# EAGLE board matrix_main_panel (EAGLE 9.5.2)
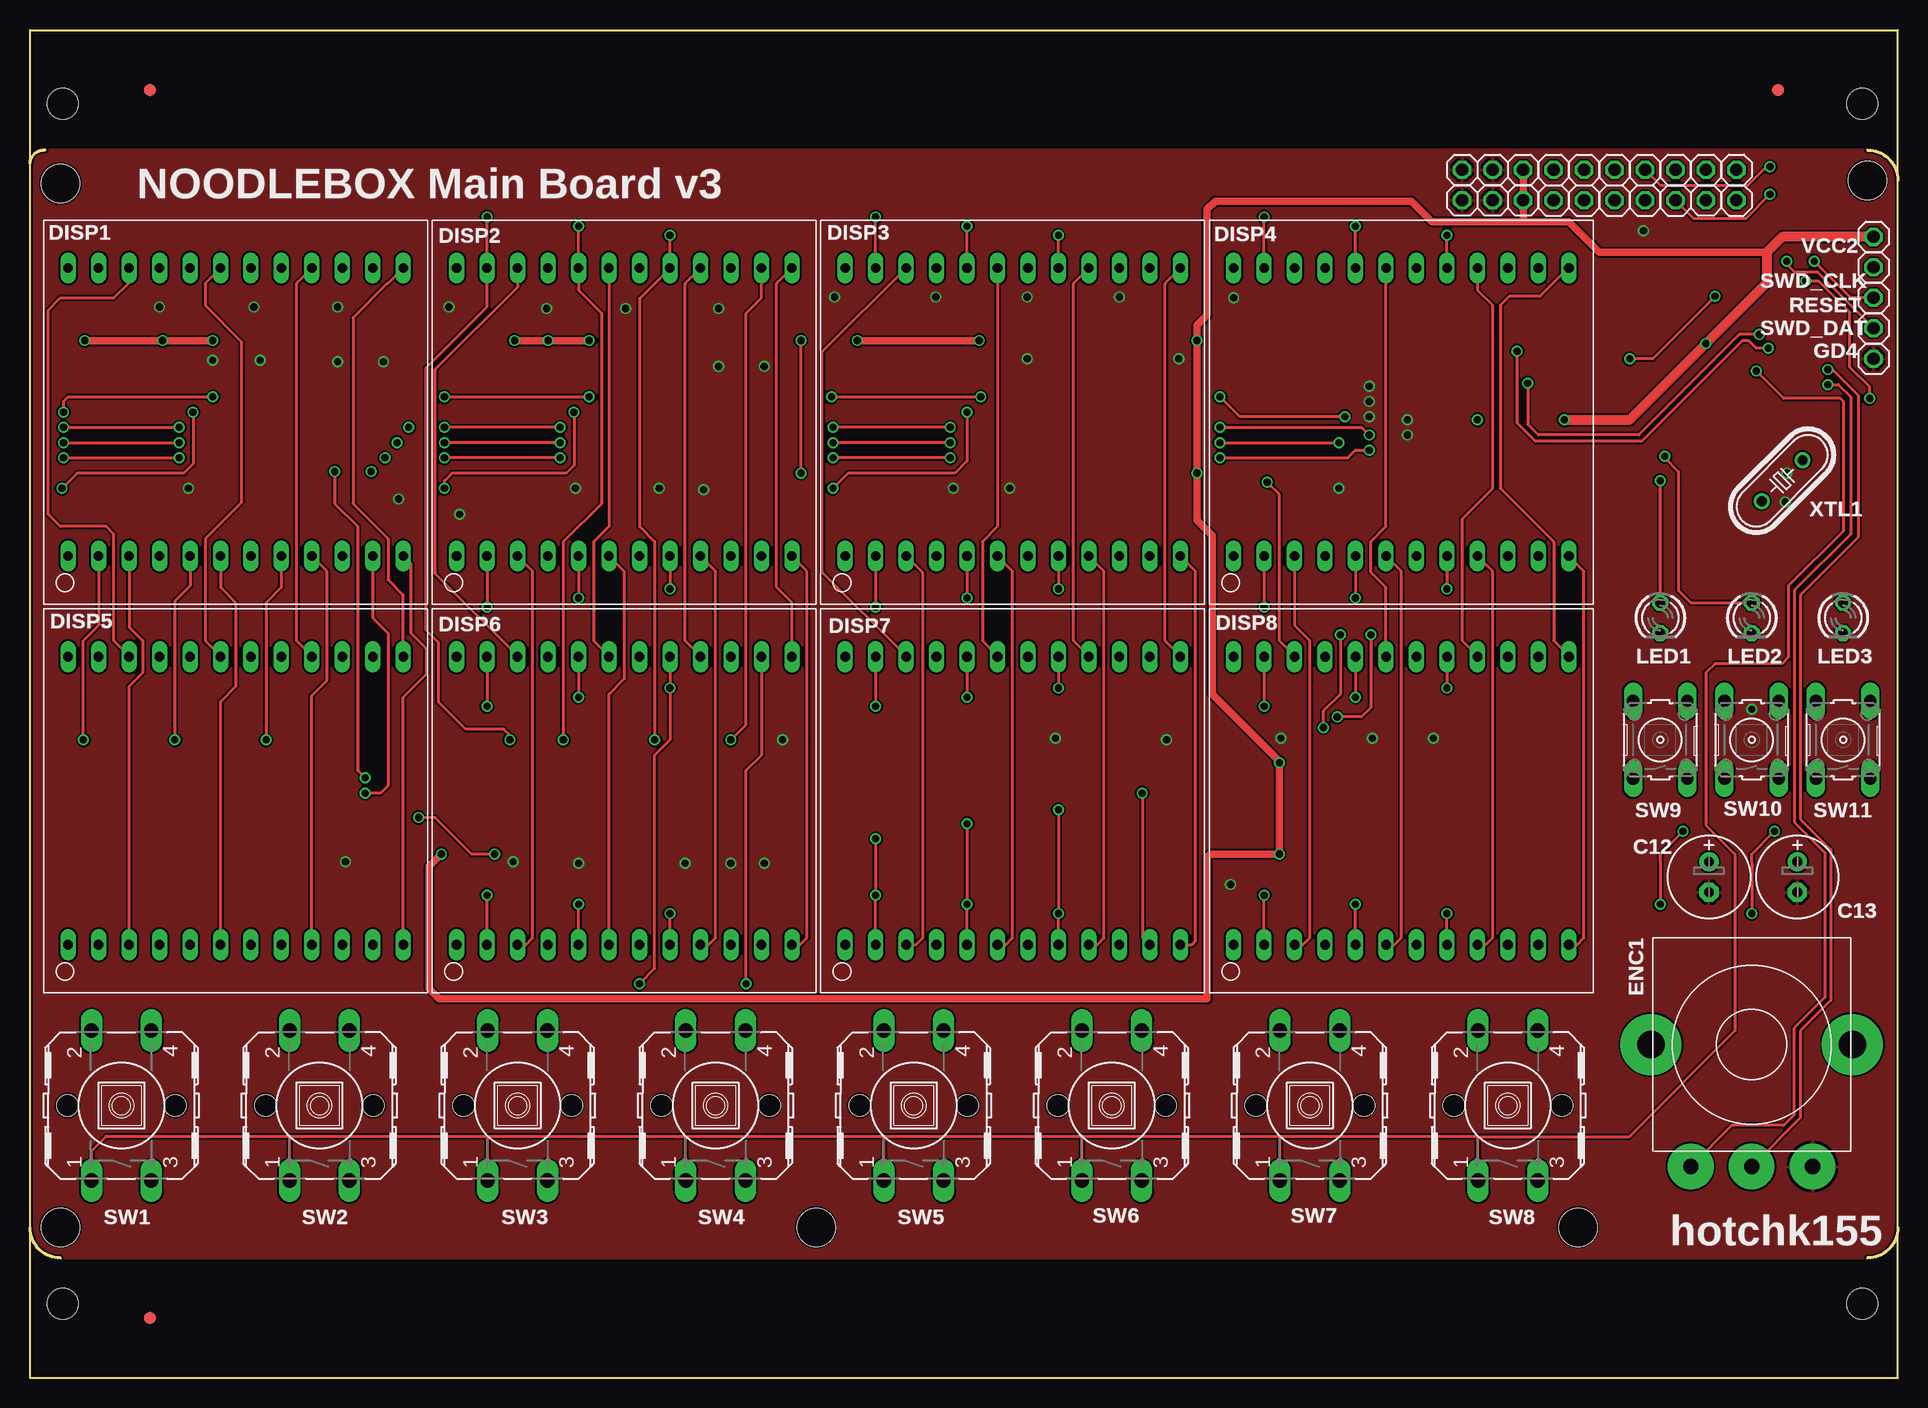
[diagram p0: board, top side]
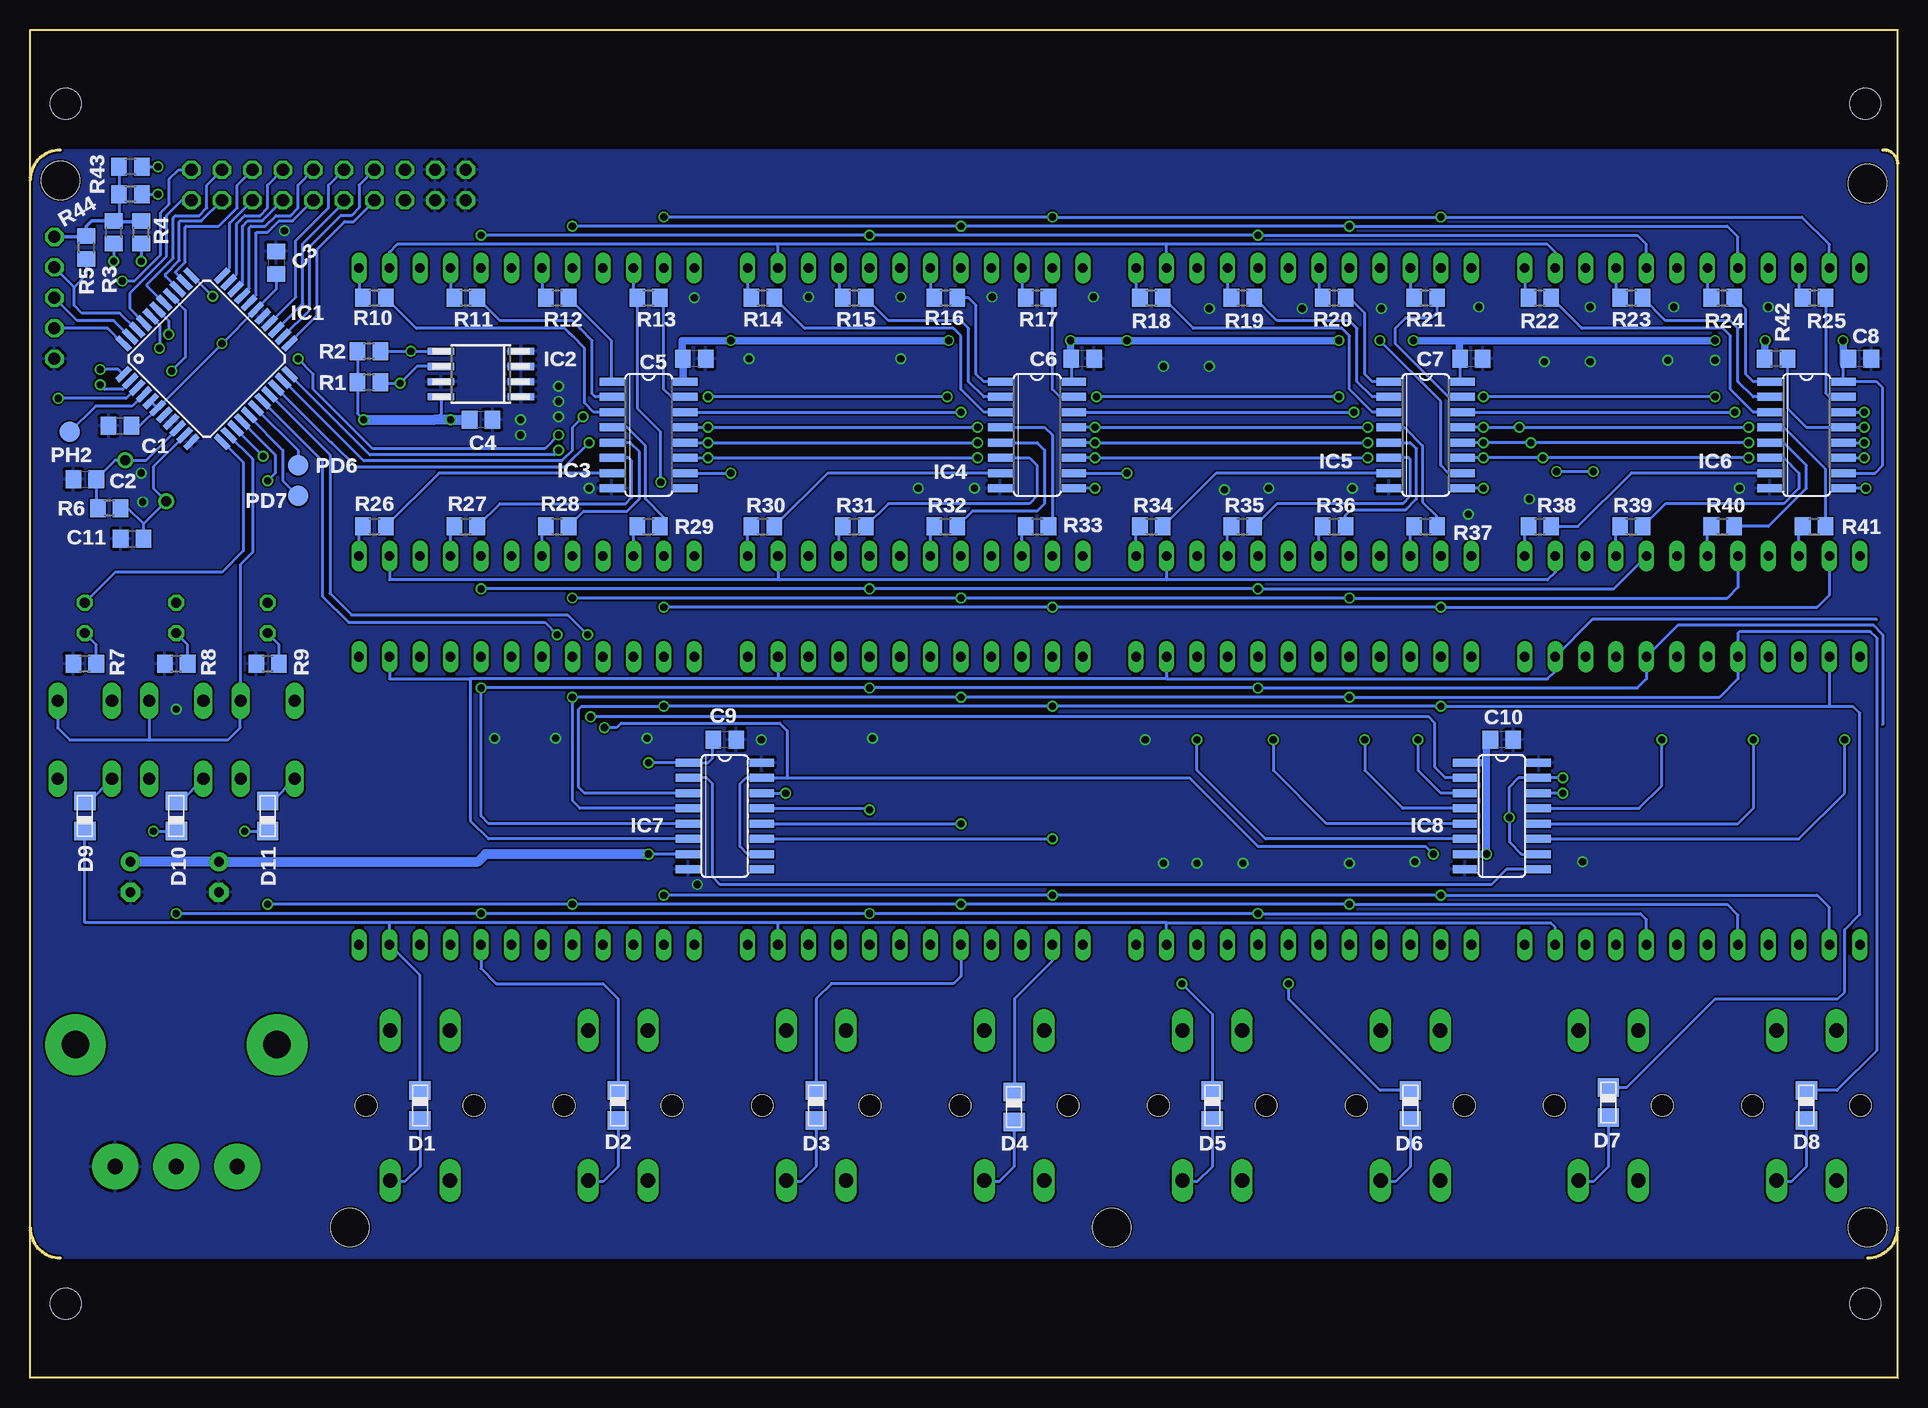
[diagram p1: board, bottom side, seen from below]

Size 155.7 x 112.33 mm. Coordinates in mm from the lower left corner, seen from the top.
Outline: 155.7,12.54 arc-90 153.16,10
Outline: 2.54,10 arc-90 0,12.54
Outline: 0,101.19 arc-93 1.27,102.33
Outline: 153.16,102.33 arc-90 155.7,99.79
Outline: 0,112.33 155.7,112.33 155.7,0 0,0 0,112.33
Copper layers (1*16): Top 0.035mm / dielectric 1.5mm / Bottom 0.035mm
Design rules "hackvana": minimum track width 6mil, minimum drill 0.3mm, track to track 6mil, track to pad 9mil, pad to pad 6mil, via to via 6mil, smd to smd 0mil, copper to edge 6mil, drill to drill 6mil, minimum pad ring 10mil, minimum via ring 6mil, stop-mask expansion 2mil, vias tented up to drill 100mil, thermal gap 10mil
Holes 3.2 mm at 2.54,12.54 2.54,99.53 153.16,99.79 65.53,12.54 129.03,12.54
Holes 2.54 mm at 2.73,106.19 152.73,106.19 152.73,6.19 2.73,6.19

## Footprints (pad centres in the part's own frame; a part is rotated, then mirrored left to right if it is on the bottom)
1X01 = drill 1.016 octagon: 1 0,0
C0805 = smd 1.3 x 1.5: 1 -0.95,0; 2 0.95,0
E2,5-7 = drill 0.813 pad 1.6: + -1.27,0 | drill 0.813 pad 1.6 octagon: - 1.27,0
0805DIODE = smd 1.524 x 1.778: A -1.262,-0.005; C 1.238,-0.005
1388_24PIN = drill 0.8 long: P$1 -13.97,-12; P$2 -11.43,-12; P$3 -8.89,-12; P$4 -6.35,-12; P$5 -3.81,-12; P$6 -1.27,-12; P$7 1.27,-12; P$8 3.81,-12; P$9 6.35,-12; P$10 8.89,-12; P$11 11.43,-12; P$12 13.97,-12; P$13 13.97,12; P$14 11.43,12; P$15 8.89,12; P$16 6.35,12; P$17 3.81,12; P$18 1.27,12; P$19 -1.27,12; P$20 -3.81,12; P$21 -6.35,12; P$22 -8.89,12; P$23 -11.43,12; P$24 -13.97,12
FIDUCIAL_1MM = smd 1 x 1: 1 0,0
ENCODER = drill 1.27 pad 3.81: A 5.08,10.16; B 0,10.16; C -5.08,10.16 | drill 2.286 pad 5.08: P$1 8.4,0; P$2 -8.4,0
TQFP44 = smd 1.5 x 0.5: 1 -5.8,4; 2 -5.8,3.2; 3 -5.8,2.4; 4 -5.8,1.6; 5 -5.8,0.8; 6 -5.8,0; 7 -5.8,-0.8; 8 -5.8,-1.6; 9 -5.8,-2.4; 10 -5.8,-3.2; 11 -5.8,-4; 23 5.8,-4; 24 5.8,-3.2; 25 5.8,-2.4; 26 5.8,-1.6; 27 5.8,-0.8; 28 5.8,0; 29 5.8,0.8; 30 5.8,1.6; 31 5.8,2.4; 32 5.8,3.2; 33 5.8,4 | smd 0.5 x 1.5: 12 -4,-5.8; 13 -3.2,-5.8; 14 -2.4,-5.8; 15 -1.6,-5.8; 16 -0.8,-5.8; 17 0,-5.8; 18 0.8,-5.8; 19 1.6,-5.8; 20 2.4,-5.8; 21 3.2,-5.8; 22 4,-5.8; 34 4,5.8; 35 3.2,5.8; 36 2.4,5.8; 37 1.6,5.8; 38 0.8,5.8; 39 0,5.8; 40 -0.8,5.8; 41 -1.6,5.8; 42 -2.4,5.8; 43 -3.2,5.8; 44 -4,5.8
SO-08M = smd 0.6 x 2.2: 1 -1.905,-3.33; 2 -0.635,-3.33; 3 0.635,-3.33; 4 1.905,-3.33; 5 1.905,3.33; 6 0.635,3.33; 7 -0.635,3.33; 8 -1.905,3.33
SO16 = smd 0.66 x 2.032: 1 -4.445,-3.073; 2 -3.175,-3.073; 3 -1.905,-3.073; 4 -0.635,-3.073; 5 0.635,-3.073; 6 1.905,-3.073; 7 3.175,-3.073; 8 4.445,-3.073; 9 4.445,3.073; 10 3.175,3.073; 11 1.905,3.073; 12 0.635,3.073; 13 -0.635,3.073; 14 -1.905,3.073; 15 -3.175,3.073; 16 -4.445,3.073
LED3MM = drill 0.813 octagon: A -1.27,0; K 1.27,0
TP17R = smd 1.7 x 1.7: TP 0,0
R0805 = smd 1.3 x 1.5: 1 -0.95,0; 2 0.95,0
B3F-40XX = drill 1.194 long: 1 -6.248,2.489; 2 6.248,2.489; 3 -6.248,-2.489; 4 6.248,-2.489 | hole 1.803: 0,-4.496; 0,4.496
B3F-10XX = drill 1.016 long: 1 -3.251,2.261; 2 3.251,2.261; 3 -3.251,-2.261; 4 3.251,-2.261
HC49/S = drill 0.813: 1 -2.413,0; 2 2.413,0

## Placement (x,y rotation side)
AUXIN  [1X01]  139.7,98.14 0 top
C1  [C0805]  148.21,79.34 0 bottom
C2  18p  [C0805]  151.13,74.9 0 bottom
C3  [C0805]  135.19,92.93 270 bottom
C4  [C0805]  118.11,79.85 180 bottom
C5  [C0805]  100.33,84.93 180 bottom
C6  [C0805]  67.95,84.93 180 bottom
C7  [C0805]  35.56,84.93 180 bottom
C8  [C0805]  3.18,84.93 180 bottom
C9  [C0805]  97.79,53.18 180 bottom
C10  [C0805]  33.02,53.18 180 bottom
C11  18p  [C0805]  147.19,69.94 0 bottom
C12  [E2,5-7]  139.95,41.75 270 top
C13  [E2,5-7]  147.32,41.75 270 top
CKOUT  [1X01]  142.24,98.14 90 top
CLKIN  [1X01]  137.16,100.68 90 top
D1  0805DIODE  [0805DIODE]  123.19,22.7 270 bottom
D2  0805DIODE  [0805DIODE]  106.68,22.7 270 bottom
D3  0805DIODE  [0805DIODE]  90.17,22.7 270 bottom
D4  0805DIODE  [0805DIODE]  73.66,22.57 270 bottom
D5  0805DIODE  [0805DIODE]  57.15,22.7 270 bottom
D6  0805DIODE  [0805DIODE]  40.64,22.7 270 bottom
D7  0805DIODE  [0805DIODE]  24.13,22.95 270 bottom
D8  0805DIODE  [0805DIODE]  7.62,22.7 270 bottom
D9  0805DIODE  [0805DIODE]  151.13,46.83 90 bottom
D10  0805DIODE  [0805DIODE]  143.51,46.83 90 bottom
D11  0805DIODE  [0805DIODE]  135.89,46.83 90 bottom
DISP1  1388BBMATRIX24PIN  [1388_24PIN]  17.14,80.48 0 top
DISP2  1388BBMATRIX24PIN  [1388_24PIN]  49.53,80.48 0 top
DISP3  1388BBMATRIX24PIN  [1388_24PIN]  81.92,80.48 0 top
DISP4  1388BBMATRIX24PIN  [1388_24PIN]  114.3,80.48 0 top
DISP5  1388BBMATRIX24PIN  [1388_24PIN]  17.14,48.1 0 top
DISP6  1388BBMATRIX24PIN  [1388_24PIN]  49.53,48.1 0 top
DISP7  1388BBMATRIX24PIN  [1388_24PIN]  81.92,48.1 0 top
DISP8  1388BBMATRIX24PIN  [1388_24PIN]  114.3,48.1 0 top
E$1  [FIDUCIAL_1MM]  10,107.33 0 top
E$2  [FIDUCIAL_1MM]  145.7,107.33 0 top
E$3  [FIDUCIAL_1MM]  10,5 0 top
ENC1  ENCODER  [ENCODER]  143.51,27.78 180 top
G1  [1X01]  129.54,100.68 90 top
G2  [1X01]  132.08,100.68 90 top
G3  [1X01]  134.62,98.14 90 top
G4  [1X01]  132.08,98.14 90 top
GD1  [1X01]  121.92,100.68 0 top
GD2  [1X01]  119.38,100.68 0 top
GD3  [1X01]  119.38,98.14 0 top
GD4  [1X01]  153.67,84.93 0 top
GD5  [1X01]  121.92,98.14 0 top
GX  [1X01]  129.54,98.14 90 top
IC1  MKE02_44PIN  [TQFP44]  140.97,84.93 45 bottom
IC2  24AA01SM  [SO-08M]  118.11,83.66 90 bottom
IC3  74HC595D  [SO16]  104.14,78.58 270 bottom
IC4  74HC595D  [SO16]  71.76,78.58 270 bottom
IC5  74HC595D  [SO16]  39.37,78.58 270 bottom
IC6  74HC595D  [SO16]  7.62,78.58 270 bottom
IC7  NPIC6C596  [SO16]  97.79,46.83 270 bottom
IC8  NPIC6C596  [SO16]  33.02,46.83 270 bottom
LED1  [LED3MM]  135.89,63.34 270 top
LED2  [LED3MM]  143.51,63.34 270 top
LED3  [LED3MM]  151.13,63.34 270 top
OFFSW  [1X01]  142.24,100.68 90 top
PD6  TPTP17R  [TP17R]  133.35,76.04 0 bottom
PD7  TPTP17R  [TP17R]  133.35,73.5 0 bottom
PH2  TPTP17R  [TP17R]  152.4,78.83 0 bottom
PWRCTL  [1X01]  139.7,100.68 90 top
R1  4k7  [R0805]  127.44,82.96 180 bottom
R2  4k7  [R0805]  127.44,85.56 180 bottom
R3  [R0805]  148.72,95.47 90 bottom
R4  [R0805]  146.43,95.47 90 bottom
R5  [R0805]  151,94.2 90 bottom
R6  [R0805]  149.1,72.48 180 bottom
R7  [R0805]  151.13,59.53 0 bottom
R8  [R0805]  143.51,59.53 0 bottom
R9  [R0805]  135.89,59.53 0 bottom
R10  [R0805]  127,90.01 0 bottom
R11  [R0805]  119.38,90.01 0 bottom
R12  [R0805]  111.76,90.01 0 bottom
R13  [R0805]  104.14,90.01 0 bottom
R14  [R0805]  94.62,90.01 0 bottom
R15  [R0805]  87,90.01 0 bottom
R16  [R0805]  79.38,90.01 0 bottom
R17  [R0805]  71.76,90.01 0 bottom
R18  [R0805]  62.23,90.01 0 bottom
R19  [R0805]  54.61,90.01 0 bottom
R20  [R0805]  46.99,90.01 0 bottom
R21  [R0805]  39.37,90.01 0 bottom
R22  [R0805]  29.84,90.01 0 bottom
R23  [R0805]  22.23,90.01 0 bottom
R24  [R0805]  14.61,90.01 0 bottom
R25  [R0805]  6.99,90.01 0 bottom
R26  [R0805]  127,70.96 0 bottom
R27  [R0805]  119.38,70.96 0 bottom
R28  [R0805]  111.76,70.96 0 bottom
R29  [R0805]  104.14,70.96 0 bottom
R30  [R0805]  94.62,70.96 0 bottom
R31  [R0805]  87,70.96 0 bottom
R32  [R0805]  79.38,70.96 0 bottom
R33  [R0805]  71.76,70.96 0 bottom
R34  [R0805]  62.23,70.96 0 bottom
R35  [R0805]  54.61,70.96 0 bottom
R36  [R0805]  46.99,70.96 0 bottom
R37  [R0805]  39.37,70.96 0 bottom
R38  [R0805]  29.84,70.96 0 bottom
R39  [R0805]  22.23,70.96 0 bottom
R40  [R0805]  14.61,70.96 0 bottom
R41  [R0805]  6.99,70.96 0 bottom
R42  [R0805]  10.16,84.93 180 bottom
R43  4k7  [R0805]  147.32,100.93 180 bottom
R44  4k7  [R0805]  147.32,98.65 180 bottom
RESET  [1X01]  153.67,90.01 0 top
RX  [1X01]  127,100.68 90 top
SCL  [1X01]  134.62,100.68 90 top
SDA  [1X01]  137.16,98.14 90 top
SW1  [B3F-40XX]  7.62,22.7 90 top
SW2  [B3F-40XX]  24.13,22.7 90 top
SW3  [B3F-40XX]  40.64,22.7 90 top
SW4  [B3F-40XX]  57.15,22.7 90 top
SW5  [B3F-40XX]  73.66,22.7 90 top
SW6  [B3F-40XX]  90.17,22.7 90 top
SW7  [B3F-40XX]  106.68,22.7 90 top
SW8  [B3F-40XX]  123.19,22.7 90 top
SW9  [B3F-10XX]  135.89,53.18 90 top
SW10  [B3F-10XX]  143.51,53.18 90 top
SW11  [B3F-10XX]  151.13,53.18 90 top
SWD_CLK  [1X01]  153.67,92.55 0 top
SWD_DAT  [1X01]  153.67,87.47 0 top
TX  [1X01]  127,98.14 90 top
VCC  [1X01]  124.46,100.68 0 top
VCC1  [1X01]  124.46,98.14 0 top
VCC2  [1X01]  153.67,95.09 0 top
XTL1  20m  [HC49/S]  146.05,74.77 45 top

## Library data of the parts
AUXIN CKOUT CLKIN G1-G4 GD1-GD5 GX OFFSW PWRCTL RESET RX SCL SDA SWD_CLK SWD_DAT TX VCC VCC1 VCC2 = pinhead
C1-C13 R1-R44 = rcl
D1-D11 IC7 IC8 = jasons_stuff
DISP1-DISP8 ENC1 IC1 = jason_eagle6
E$1-E$3 = adafruit
IC2 = microchip; MF: MICROCHIP; MPN: 24AA01-I/SN; OC_FARNELL: 1331268; OC_NEWARK: 92C6793
IC3-IC6 = 74xx-eu
LED1-LED3 = led
PD6 PD7 PH2 = testpad
SW1-SW8 = switch-omron; MF: OMRON COMPONENTS USA; MPN: B3F-4000; OC_FARNELL: 176434; OC_NEWARK: 36K3105
SW9-SW11 = switch-omron; MPN: B3F-1000; OC_FARNELL: 176432; OC_NEWARK: 36M3542
XTL1 = crystal; OC_FARNELL: 1667008; OC_NEWARK: unknown

## Nets
+5V: C1.2 C3.2 C4.2 C5.2 C6.2 C7.2 C8.2 C9.2 C10.2 C12.+ C13.+ IC1.5 IC1.6 IC1.28 IC2.8 IC3.10 IC3.16 IC4.10 IC4.16 IC5.10 IC5.16 IC6.10 IC6.16 IC7.1 IC7.7 IC8.1 IC8.7 R1.2 R2.2 R3.2 R4.2 R5.2 R42.2 R43.2 R44.2 VCC1.1 VCC2.1 VCC.1
A0: DISP1.P$22 DISP5.P$22 R25.1
A1: DISP1.P$19 DISP5.P$19 R24.1
A2: DISP1.P$16 DISP5.P$16 R23.1
A3: DISP1.P$13 DISP5.P$13 R22.1
A4: DISP1.P$3 DISP5.P$3 R41.1
A5: DISP1.P$6 DISP5.P$6 R40.1
A6: DISP1.P$9 DISP5.P$9 R39.1
A7: DISP1.P$12 DISP5.P$12 R38.1
A8: DISP2.P$22 DISP6.P$22 R21.1
A9: DISP2.P$19 DISP6.P$19 R20.1
A10: DISP2.P$16 DISP6.P$16 R19.1
A11: DISP2.P$13 DISP6.P$13 R18.1
A12: DISP2.P$3 DISP6.P$3 R37.1
A13: DISP2.P$6 DISP6.P$6 R36.1
A14: DISP2.P$9 DISP6.P$9 R35.1
A15: DISP2.P$12 DISP6.P$12 R34.1
A16: DISP3.P$22 DISP7.P$22 R17.1
A17: DISP3.P$19 DISP7.P$19 R16.1
A18: DISP3.P$16 DISP7.P$16 R15.1
A19: DISP3.P$13 DISP7.P$13 R14.1
A20: DISP3.P$3 DISP7.P$3 R33.1
A21: DISP3.P$6 DISP7.P$6 R32.1
A22: DISP3.P$9 DISP7.P$9 R31.1
A23: DISP3.P$12 DISP7.P$12 R30.1
A24: DISP4.P$22 DISP8.P$22 R13.1
A25: DISP4.P$19 DISP8.P$19 R12.1
A26: DISP4.P$16 DISP8.P$16 R11.1
A27: DISP4.P$13 DISP8.P$13 R10.1
A28: DISP4.P$3 DISP8.P$3 R29.1
A29: DISP4.P$6 DISP8.P$6 R28.1
A30: DISP4.P$9 DISP8.P$9 R27.1
A31: DISP4.P$12 DISP8.P$12 R26.1
AUXIN: AUXIN.1 IC1.36
AUXOUT: GX.1 IC1.25
D_ACK: IC1.22 IC3.11 IC4.11 IC5.11 IC6.11
D_ADT: IC1.21 IC6.14
D_ARK: IC1.20 IC3.12 IC4.12 IC5.12 IC6.12
D_ENA: IC1.34 IC3.13 IC4.13 IC5.13 IC6.13 R42.1
D_KCK: IC1.19 IC7.10 IC7.15 IC8.10 IC8.15
D_KDT: IC1.18 IC8.2
ENC1: ENC1.B IC1.1
ENC2: ENC1.A IC1.2
GATE1: G3.1 IC1.31
GATE2: G2.1 IC1.30
GATE3: G4.1 IC1.29
GATE4: G1.1 IC1.26
GND: C1.1 C2.1 C3.1 C4.1 C5.1 C6.1 C7.1 C8.1 C9.1 C10.1 C11.1 C12.- C13.- ENC1.C GD1.1 GD2.1 GD3.1 GD4.1 GD5.1 IC1.8 IC1.11 IC1.27 IC2.1 IC2.2 IC2.3 IC2.4 IC2.7 IC3.8 IC4.8 IC5.8 IC6.8 IC7.8 IC7.16 IC8.8 IC8.16 R7.1 R8.1 R9.1
I2C0SCL: IC1.32 R43.1 SCL.1
I2C0SDA: IC1.33 R44.1 SDA.1
I2C1SCL: IC1.39 IC2.6 R1.1
I2C1SDA: IC1.40 IC2.5 R2.1
K0: DISP1.P$23 DISP2.P$23 DISP3.P$23 DISP4.P$23 IC8.3
K1: DISP1.P$20 DISP2.P$20 DISP3.P$20 DISP4.P$20 IC8.4
K2: DISP1.P$17 DISP2.P$17 DISP3.P$17 DISP4.P$17 IC8.5
K3: DISP1.P$14 DISP2.P$14 DISP3.P$14 DISP4.P$14 IC8.6
K4: DISP1.P$2 DISP2.P$2 DISP3.P$2 DISP4.P$2 IC8.11
K5: DISP1.P$5 DISP2.P$5 DISP3.P$5 DISP4.P$5 IC8.12
K6: DISP1.P$8 DISP2.P$8 DISP3.P$8 DISP4.P$8 IC8.13
K7: DISP1.P$11 DISP2.P$11 DISP3.P$11 DISP4.P$11 IC8.14
K8: D7.A DISP5.P$23 DISP6.P$23 DISP7.P$23 DISP8.P$23 IC7.3
K9: D8.A DISP5.P$20 DISP6.P$20 DISP7.P$20 DISP8.P$20 IC7.4
K10: D6.A DISP5.P$17 DISP6.P$17 DISP7.P$17 DISP8.P$17 IC7.5
K11: D5.A DISP5.P$14 DISP6.P$14 DISP7.P$14 DISP8.P$14 IC7.6
K12: D4.A DISP5.P$2 DISP6.P$2 DISP7.P$2 DISP8.P$2 IC7.11
K13: D3.A D11.A DISP5.P$5 DISP6.P$5 DISP7.P$5 DISP8.P$5 IC7.12
K14: D2.A D10.A DISP5.P$8 DISP6.P$8 DISP7.P$8 DISP8.P$8 IC7.13
K15: D1.A D9.A DISP5.P$11 DISP6.P$11 DISP7.P$11 DISP8.P$11 IC7.14
KEY_READ1: IC1.37 SW1.1 SW2.1 SW3.1 SW4.1 SW5.1 SW6.1 SW7.1 SW8.1
KEY_READ2: IC1.13 SW9.4 SW10.4 SW11.4
LED1: IC1.12 LED3.A
LED2: IC1.14 LED2.A
LED3: IC1.15 LED1.A
MIDIRX: IC1.24 RX.1
MIDITX: IC1.23 TX.1
N$1: D10.C SW10.1
N$2: LED3.K R7.2
N$3: LED2.K R8.2
N$4: C2.2 IC1.9 R6.2 XTL1.2
N$5: C11.2 IC1.10 R6.1 XTL1.1
N$6: LED1.K R9.2
N$7: D9.C SW11.1
N$8: D11.C SW9.1
N$9: D7.C SW2.3
N$11: D8.C SW1.3
N$13: D6.C SW3.3
N$14: D5.C SW4.3
N$16: D4.C SW5.3
N$17: IC6.15 R25.2
N$18: IC6.1 R24.2
N$19: IC6.2 R23.2
N$20: IC6.3 R22.2
N$21: IC6.4 R41.2
N$22: IC6.5 R40.2
N$23: IC6.6 R39.2
N$24: IC6.7 R38.2
N$30: IC5.14 IC6.9
N$31: IC4.14 IC5.9
N$32: IC3.14 IC4.9
N$49: IC5.15 R21.2
N$50: IC5.1 R20.2
N$51: IC5.2 R19.2
N$52: IC5.3 R18.2
N$53: IC5.4 R37.2
N$54: IC5.5 R36.2
N$55: IC5.6 R35.2
N$56: IC5.7 R34.2
N$60: D3.C SW6.3
N$61: D2.C SW7.3
N$62: D1.C SW8.3
N$81: IC4.15 R17.2
N$82: IC4.1 R16.2
N$83: IC4.2 R15.2
N$84: IC4.3 R14.2
N$85: IC4.4 R33.2
N$86: IC4.5 R32.2
N$87: IC4.6 R31.2
N$88: IC4.7 R30.2
N$113: IC3.15 R13.2
N$114: IC3.1 R12.2
N$115: IC3.2 R11.2
N$116: IC3.3 R10.2
N$117: IC3.4 R29.2
N$118: IC3.5 R28.2
N$119: IC3.6 R27.2
N$120: IC3.7 R26.2
N$122: IC7.2 IC8.9
NRESET: IC1.43 R3.1 RESET.1
OFF_SW: IC1.3 OFFSW.1
PTD6: IC1.17 PD6.TP
PTD7: IC1.16 PD7.TP
PTH2: IC1.4 PH2.TP
PWR_CTRL: IC1.38 PWRCTL.1
SWDCLK: IC1.42 R5.1 SWD_CLK.1
SWDIO: IC1.44 R4.1 SWD_DAT.1
SYNCIN: CLKIN.1 IC1.35
SYNCOUT: CKOUT.1 IC1.41

## Tracks (layer width: path | path; a pad name or v marks a point on that pad's centre or on a via)
+5V  (via drill 0.6, 0.6 pad 0.25)
  Top 0.254: v64.26,75.41 v64.26,86.45 | v43.18,86.45 40.89,86.45
  Top 0.61: v4.57,86.45 v11.05,86.45 v15.24,86.45 | v40.39,86.45 v43.18,86.45 v46.61,86.45 | v68.96,86.45 v79.12,86.45 | v34.29,43.66 33.27,42.64 33.27,32.42 34.1,31.59 98.11,31.59 98.11,43.4 98.36,43.66 v104.14,43.66 v104.14,51.27 104.14,51.4 98.55,56.99 98.55,70.2 97.28,71.47 v97.28,75.41 v97.28,86.45 97.28,87.72 98.11,88.55 98.11,97.38 98.81,98.08 115.12,98.08 116.84,96.36 124.46,96.36 | 124.46,96.36 128.27,96.36 130.81,93.82 144.78,93.82 | VCC.1 VCC1.1 124.46,96.36
  Top 0.813: v127.89,79.85 133.35,79.85 v139.7,86.2 144.78,91.28 144.78,93.82 146.05,95.09 VCC2.1
  Bottom 0.254: C6.2 68.9,83.24 IC4.16 | C7.2 36.51,83.24 IC5.16 | 4.55,84.51 IC6.16 1.78,83.02 1.27,82.52 1.27,76.04 1.9,75.41 IC6.10 | IC7.7 v104.14,43.66 | v104.14,51.27 IC7.1 99.19,51.27 98.81,51.66 98.81,53.11 C9.2 | IC4.10 v64.26,75.41 | C8.2 4.55,84.93 | IC3.10 v97.28,75.41 | IC5.10 37.46,75.41 38.1,76.04 38.1,81.37 v43.18,86.45 | IC1.6 146.56,79.34 C1.2 | IC1.5 | IC1.5 IC1.6 | IC2.8 121.44,80.33 121.92,79.85 | IC1.6 v139.7,86.2 IC1.28 135.19,90.71 C3.2 | R2.2 R1.2 128.39,80.36 v127.89,79.85 | 146.05,96.36 146.37,96.36 R4.2 | R43.2 R44.2 148.27,96.87 R3.2
  Bottom 0.305: 146.69,96.36 148.66,96.36 | R3.2 150.56,96.42 151,95.98 R5.2 | VCC2.1 151.06,95.09
  Bottom 0.61: 4.55,84.51 4.55,84.93 4.55,86.43 v4.57,86.45 | v15.24,86.45 36.7,86.45 | 36.7,86.45 v40.39,86.45 | C7.2 36.58,85 36.58,86.33 36.7,86.45 | v46.61,86.45 v64.26,86.45 v68.96,86.45 68.96,85 C6.2 | v79.12,86.45 v97.28,86.45 101.35,86.45 101.35,85 C5.2 101.28,83.24 IC3.16 | R42.2 11.11,86.39 v11.05,86.45 | IC8.7 v34.29,43.66 34.29,51.27 | 34.29,51.27 34.29,52.86 C10.2 | IC8.1 34.29,51.27
  Bottom 0.813: R4.2 146.62,96.61 146.62,96.43 146.69,96.36 | 148.66,96.36 R3.2 | 151.06,95.09 R5.2 | v104.14,43.66 117.73,43.66 118.36,43.02 C12.+ C13.+ | v127.89,79.85 121.92,79.85 v120.65,79.85 C4.2
A0
  Top 0.254: DISP5.P$22 8.26,60.16 6.99,61.43 6.99,70.33 6.35,70.96 2.54,70.96 1.52,71.98 1.52,88.99 2.54,90.01 6.99,90.01 8.26,91.28 DISP1.P$22
  Bottom 0.254: DISP1.P$22 8.26,90.33 R25.1
A1
  Top 0.254: DISP5.P$19 15.88,60.16 14.61,61.43 14.61,69.94 17.65,72.99 17.65,86.33 14.61,89.38 14.61,91.22 DISP1.P$19
  Bottom 0.254: DISP1.P$19 15.88,90.33 R24.1
A2
  Top 0.254: DISP5.P$16 23.5,60.16 22.23,61.43 22.23,91.22 DISP1.P$16
  Bottom 0.254: DISP1.P$16 23.5,90.33 R23.1
A3
  Top 0.254: 31.11,60.16 DISP5.P$13 31.11,65.25 29.84,66.52 29.84,69.94 26.92,72.86 26.92,88.36 29.78,91.22 29.84,91.22 DISP1.P$13
  Bottom 0.254: DISP1.P$13 31.11,90.33 R22.1
A4
  Top 0.254: DISP5.P$3 8.26,57.62 9.4,58.77 9.4,61.43 8.26,62.58 DISP1.P$3
  Bottom 0.254: DISP1.P$3 8.26,70.64 R41.1
A5
  Top 0.254: DISP5.P$6 15.88,56.35 17.14,57.62 17.14,64.61 15.88,65.88 DISP1.P$6
  Bottom 0.254: DISP1.P$6 15.88,70.64 R40.1
A6
  Top 0.254: DISP5.P$9 23.5,56.86 24.77,58.13 24.77,67.22 DISP1.P$9
  Bottom 0.254: DISP1.P$9 23.5,70.64 R39.1
A7
  Top 0.254: DISP1.P$12 31.75,67.85 31.75,62.07 33.02,60.8 33.02,58.64 31.11,56.74 DISP5.P$12
  Bottom 0.254: DISP1.P$12 31.11,70.64 R38.1
A8
  Top 0.254: DISP6.P$22 40.64,60.16 33.78,67.02 33.78,84.04 40.64,90.9 DISP2.P$22
  Bottom 0.254: DISP2.P$22 40.64,90.33 R21.1
A9
  Top 0.254: DISP6.P$19 48.26,60.16 46.99,61.43 46.99,69.69 48.26,70.96 DISP2.P$19
  Bottom 0.254: DISP2.P$19 48.26,90.33 R20.1
A10
  Top 0.254: DISP6.P$16 55.88,60.16 54.61,61.43 54.61,91.22 DISP2.P$16
  Bottom 0.254: DISP2.P$16 55.88,90.33 R19.1
A11
  Top 0.254: DISP2.P$13 62.23,91.22 62.23,65.88 63.5,64.61 DISP6.P$13
  Bottom 0.254: DISP2.P$13 63.5,90.33 R18.1
A12
  Top 0.254: DISP6.P$3 41.34,36.1 41.91,36.67 41.91,67.22 DISP2.P$3
  Bottom 0.254: DISP2.P$3 40.64,70.64 R37.1
A13
  Top 0.254: DISP2.P$6 49.53,67.22 49.53,58.26 48.26,56.99 DISP6.P$6
  Bottom 0.254: DISP2.P$6 48.26,70.64 R36.1
A14
  Top 0.254: DISP6.P$9 56.58,36.1 57.15,36.67 57.15,67.22 DISP2.P$9
  Bottom 0.254: DISP2.P$9 55.88,70.64 R35.1
A15
  Top 0.254: DISP6.P$12 64.2,36.1 64.77,36.67 64.77,67.22 DISP2.P$12
  Bottom 0.254: DISP2.P$12 63.5,70.64 R34.1
A16
  Top 0.254: DISP7.P$22 73.03,60.16 66.04,67.15 66.04,85.5 DISP3.P$22
  Bottom 0.254: DISP3.P$22 73.03,90.33 R17.1
A17
  Top 0.254: DISP7.P$19 80.65,60.16 79.38,61.43 79.38,69.69 80.65,70.96 DISP3.P$19
  Bottom 0.254: DISP3.P$19 80.65,90.33 R16.1
A18
  Top 0.254: DISP7.P$16 88.27,60.16 87,61.43 87,91.22 DISP3.P$16
  Bottom 0.254: DISP3.P$16 88.27,90.33 R15.1
A19
  Top 0.254: DISP7.P$13 95.89,60.16 94.62,61.43 94.62,91.22 DISP3.P$13
  Bottom 0.254: DISP3.P$13 95.89,90.33 R14.1
A20
  Top 0.254: DISP7.P$3 73.85,36.1 74.42,36.67 74.42,67.09 DISP3.P$3
  Bottom 0.254: DISP3.P$3 73.03,70.33 72.39,70.96 R33.1
A21
  Top 0.254: DISP7.P$6 81.34,36.1 81.92,36.67 81.92,67.22 DISP3.P$6
  Bottom 0.254: DISP3.P$6 80.65,70.64 R32.1
A22
  Top 0.254: DISP7.P$9 88.97,36.1 89.54,36.67 89.54,67.22 DISP3.P$9
  Bottom 0.254: DISP3.P$9 88.27,70.64 R31.1
A23
  Top 0.254: DISP7.P$12 96.84,36.1 97.16,36.42 97.16,67.22 DISP3.P$12
  Bottom 0.254: DISP3.P$12 95.89,70.64 R30.1
A24  (via drill 0.6 pad 0.25)
  Top 0.254: DISP8.P$22 105.41,60.16 104.14,61.43 104.14,73.63 v103.12,74.64
  Bottom 0.254: DISP4.P$22 105.41,90.01 R13.1 105.09,80.8 103.12,78.83 v103.12,74.64
A25
  Top 0.254: DISP4.P$19 113.03,70.96 111.76,69.69 111.76,67.15 113.03,65.88 DISP8.P$19
  Bottom 0.254: DISP4.P$19 113.03,90.33 R12.1
A26
  Top 0.254: DISP8.P$16 120.65,60.16 119.38,61.43 119.38,71.59 121.92,74.13 121.92,89.38 120.65,90.64 DISP4.P$16
  Bottom 0.254: DISP4.P$16 120.65,90.33 R11.1
A27
  Top 0.254: DISP8.P$13 128.27,60.16 127,61.43 127,69.69 122.56,74.13 122.56,89.38 123.32,90.14 125.86,90.14 128.2,92.48 DISP4.P$13
  Bottom 0.254: DISP4.P$13 128.27,90.33 R10.1
A28
  Top 0.254: DISP8.P$3 106.11,36.1 106.68,36.67 106.68,61.43 105.41,62.7 DISP4.P$3
  Bottom 0.254: DISP4.P$3 105.41,70.64 R29.1
A29
  Top 0.254: DISP8.P$6 113.73,36.1 114.3,36.67 114.3,67.22 DISP4.P$6
  Bottom 0.254: DISP4.P$6 113.03,70.64 R28.1
A30
  Top 0.254: DISP8.P$9 121.35,36.1 121.92,36.67 121.92,67.22 DISP4.P$9
  Bottom 0.254: DISP4.P$9 120.65,70.64 R27.1
A31
  Top 0.254: DISP8.P$12 128.97,36.1 129.54,36.67 129.54,67.22 DISP4.P$12 128.27,68.42
  Bottom 0.254: DISP4.P$12 128.27,70.64 R26.1
AUXIN
  Bottom 0.254: IC1.36 143.37,90.76 144.4,91.79 144.4,91.98 143.26,93.12 143.26,96.36 143.19,96.42 141.41,96.42 AUXIN.1
AUXOUT
  Bottom 0.254: IC1.25 135.14,87.33 132.97,89.5 132.97,94.52 129.54,97.95 GX.1
D_ACK  (via drill 0.6, 0.6 pad 0.25)
  Top 0.254: v2.79,76.67 v12.45,76.67 | v44.2,76.67 v34.54,76.67 | v76.71,76.67 v66.93,76.67 | v99.19,76.67 109.86,76.67 110.49,77.31 v111.63,77.31
  Bottom 0.254: IC6.11 v2.79,76.67 | v12.45,76.67 v29.59,76.67 v34.54,76.67 IC5.11 | v44.2,76.67 v66.93,76.67 IC4.11 | v76.71,76.67 v99.19,76.67 IC3.11 | IC1.22 134.04,83.59 127.38,76.93 112.01,76.93 v111.63,77.31
D_ADT  (via drill 0.6, 0.6 pad 0.25)
  Top 0.254: v2.79,80.48 2.79,81.37 3.18,81.75 v15.24,81.75 | v34.54,81.75 v46.61,81.75 | v66.8,81.75 v79.25,81.75 | v109.6,80.1 100.84,80.1 v99.19,81.75
  Bottom 0.254: IC6.14 v2.79,80.48 | v15.24,81.75 v34.54,81.75 | v46.61,81.75 v66.8,81.75 | v79.25,81.75 v99.19,81.75 | IC1.21 134.56,83.09 127.89,76.42 111.38,76.42 110.49,77.31 110.49,79.22 v109.6,80.1
D_ARK  (via drill 0.6, 0.6 pad 0.25)
  Top 0.254: v2.79,77.94 v12.45,77.94 | v44.2,77.94 v34.54,77.94 | v76.71,77.94 v66.93,77.94 | v99.19,77.94 v109.09,77.94
  Bottom 0.254: IC6.12 v2.79,77.94 | v12.45,77.94 v30.6,77.94 v34.54,77.94 IC5.12 | v44.2,77.94 v66.93,77.94 IC4.12 | v76.71,77.94 v99.19,77.94 IC3.12 | IC1.20 130.59,77.94 130.56,77.94 128.52,75.91 111.12,75.91 v109.09,77.94
D_ENA  (via drill 0.6, 0.6 pad 0.25)
  Top 0.254: v2.79,79.22 v12.45,79.22 12.7,79.22 | v44.2,79.22 v34.54,79.22 | v76.71,79.22 v66.93,79.22 | v99.19,79.22 111,79.22 v111.63,78.58 | v140.46,90.14 135.25,84.93 v133.35,84.93
  Bottom 0.254: v2.79,79.22 IC6.13 7.62,79.22 9.21,80.8 R42.1 | v12.45,79.22 v31.56,79.22 v34.54,79.22 IC5.13 | v44.2,79.22 v66.93,79.22 IC4.13 | v76.71,79.22 v99.19,79.22 IC3.13 | IC1.34 142.19,91.86 v140.46,90.14 | v111.63,78.58 112.78,77.44 127.13,77.44 132.08,82.39 132.08,83.66 v133.35,84.93
D_KCK  (via drill 0.6, 0.6 pad 0.25)
  Top 0.254: v38.73,43.66 36.83,43.66 33.78,46.7 v32.38,46.7 | v25.4,75.53 25.4,72.86 27.3,70.96 27.3,50.64 v27.94,50 | v109.22,61.94 109.22,56.99 107.82,55.59 v107.82,54.2
  Bottom 0.254: IC8.10 31.37,43.66 32.38,44.67 v32.38,46.7 32.38,49.24 31.62,50 IC8.15 v27.94,50 | IC7.10 95.89,43.66 96.52,44.29 96.52,49.5 96.01,50 IC7.15 92.58,50 | 92.58,50 59.05,50 53.34,44.29 39.37,44.29 v38.73,43.66 | v25.4,75.53 v28.45,75.53 | 92.58,50 92.58,53.94 93.22,54.58 106.43,54.58 106.81,54.2 v107.82,54.2 | IC1.19 135.71,81.96 130.68,76.93 130.68,65.37 128.91,63.59 110.87,63.59 v109.22,61.94
D_KDT  (via drill 0.6 pad 0.25)
  Top 0.254: v111.76,61.94 111.76,55.85 111,55.09 v108.97,55.09
  Bottom 0.254: IC8.2 37.72,50 38.61,50.89 38.61,54.58 39.12,55.09 v108.97,55.09 | IC1.18 131.32,76.41 131.32,65.12 129.16,62.96 112.78,62.96 v111.76,61.94
ENC1  (via drill 0.6 pad 0.25)
  Top 0.254: v149.86,84.04 150.24,84.04 152.4,81.88 152.4,70.07 147.57,65.25 147.57,46.58 150.11,44.04 150.11,31.46 147.57,28.92 147.57,21.68 ENC1.B
  Bottom 0.254: IC1.1 147.95,83.66 148.34,84.04 v149.86,84.04
ENC2  (via drill 0.6 pad 0.25)
  Top 0.254: v149.86,82.77 150.75,82.77 151.76,81.75 151.76,70.33 147.07,65.63 147.07,46.32 149.61,43.78 149.61,31.72 147.07,29.18 147.07,21.94 146.18,21.05 141.86,21.05 ENC1.A
  Bottom 0.254: IC1.2 147.33,83.01 147.95,82.39 149.48,82.39 v149.86,82.77
GATE1
  Bottom 0.254: IC1.31 138.57,90.76 138.5,90.76 137.99,91.28 137.99,95.98 137.54,96.42 136.33,96.42 G3.1
GATE2
  Bottom 0.254: IC1.30 138,90.19 137.41,90.77 137.41,95.85 137.29,95.98 136.08,95.98 135.19,96.87 133.98,96.87 133.35,97.5 133.35,99.41 G2.1
GATE3
  Bottom 0.254: IC1.29 137.43,89.67 136.84,90.26 136.84,95.47 135.89,95.47 134.94,96.42 133.79,96.42 G4.1
GATE4
  Bottom 0.254: IC1.26 135.71,87.9 133.54,90.07 133.54,94.77 130.81,97.5 130.81,99.41 G1.1
GND  (via drill 0.6)
  other vias: 13.21,74.13 94.74,53.18 100.08,41.11 109.09,74.13 95.76,84.93 83.12,84.93 81.66,74.13 76.96,74.13 57.4,84.3 45.47,74.13 52.45,74.13 56.13,74.01 15.24,84.8 19.18,84.8 25.65,84.68 40.26,43.02 26.29,43.02 45.72,42.89 61.21,42.89 29.46,84.68 30.73,73.25 35.81,71.98 114.81,79.85 111.63,80.1 111.63,81.37 111.63,82.64 114.81,78.58 134.49,95.6 146.3,72.99 146.43,75.41 62.74,53.18 85.47,53.31 104.27,53.31 111.89,53.31 116.97,53.31 100.33,90.01 90.81,90.07 83.12,90.07 75.5,90.07 67.06,90.07 57.4,89.12 49.66,89.12 43.05,89.12 34.92,89.25 25.65,89.25 18.67,89.25 10.79,89.25 143.51,55.72 61.21,84.3 54.61,42.89 58.42,42.89
  pour Top: 155.7,102.33 0,102.33 0,10 155.7,10
  pour Bottom: 0,102.33 0,10 155.7,10 155.7,102.33
I2C0SCL  (via drill 0.6)
  Top 0.254: SCL.1 135.89,99.41 143.19,99.41 144.72,100.93 v145.03,100.93
  Bottom 0.254: IC1.32 139.13,91.34 138.49,91.98 138.49,96.17 137.79,96.87 136.52,96.87 135.89,97.5 135.89,99.41 SCL.1 | R43.1 v145.03,100.93
I2C0SDA  (via drill 0.6)
  Top 0.254: v145.03,98.65 143,96.61 138.68,96.61 SDA.1
  Bottom 0.254: IC1.33 139.06,92.49 139.06,96.23 SDA.1 | R44.1 v145.03,98.65
I2C1SCL  (via drill 0.6)
  Top 0.254: v144.14,86.96 142.49,86.96 134.11,78.58 125.73,78.58 124.84,79.47 v124.84,82.9
  Bottom 0.254: IC1.39 | IC1.39 144.14,88.11 v144.14,86.96 | R1.1 126.43,82.9 v124.84,82.9 123.44,84.3 IC2.6
I2C1SDA  (via drill 0.6)
  Top 0.254: v144.91,85.82 143.89,85.82 143.26,86.45 142.75,86.45 134.37,78.07 125.48,78.07 123.95,79.6 v123.95,85.56
  Bottom 0.254: IC1.40 145.64,88.45 144.91,87.72 v144.91,85.82 | IC2.5 v123.95,85.56 R2.1
K0  (via drill 0.6)
  Top 0.254: DISP4.P$23 v102.87,96.74 | DISP3.P$23 v70.48,96.74 | v38.1,96.74 DISP2.P$23 38.1,89.25 33.02,84.17 33.02,62.32 34.04,61.31 34.04,56.35 36.32,54.07 39.5,54.07 40,53.56 v40,53.18
  Bottom 0.254: IC8.3 38.1,48.73 40,50.64 v40,53.18 | v102.87,96.74 v70.48,96.74 v38.1,96.74 8,96.74 5.71,94.45 DISP1.P$23
K1  (via drill 0.6)
  Top 0.254: DISP4.P$20 v110.49,95.98 | DISP3.P$20 v78.11,95.98 | v45.72,95.98 DISP2.P$20 45.72,90.64 47.62,88.74 47.62,72.86 44.45,69.69 v44.45,53.18
  Bottom 0.254: DISP1.P$20 13.34,95.09 14.22,95.98 v45.72,95.98 v78.11,95.98 v110.49,95.98 | IC8.4 41.27,47.46 44.45,50.64 v44.45,53.18
K2  (via drill 0.6)
  Top 0.254: DISP4.P$17 v118.11,95.22 | DISP3.P$17 v85.73,95.22 | v53.34,95.22 DISP2.P$17 50.8,89.94 50.8,70.96 52.07,69.69 v52.07,53.18
  Bottom 0.254: DISP1.P$17 20.96,94.45 21.72,95.22 v53.34,95.22 v85.73,95.22 v118.11,95.22 | IC8.5 47.62,46.2 52.07,50.64 v52.07,53.18
K3  (via drill 0.6)
  Top 0.254: v58.42,53.18 59.69,54.45 59.69,88.74 60.96,90.01 DISP2.P$14
  Bottom 0.254: DISP1.P$14 28.57,93.82 29.21,94.45 60.96,94.45 | 60.96,94.45 93.34,94.45 | 93.34,94.45 125.09,94.45 125.73,93.82 DISP4.P$14 | IC8.6 52.7,44.92 58.42,50.64 v58.42,53.18 | DISP3.P$14 93.34,94.45 | DISP2.P$14 60.96,94.45
K4  (via drill 0.6)
  Top 0.254: v4.45,53.18 4.45,61.43 5.71,62.7 DISP1.P$2 | DISP4.P$2 v102.87,64.23 | DISP3.P$2 v70.48,64.23 | DISP2.P$2 v38.1,64.23
  Bottom 0.254: DISP1.P$2 5.71,65.25 6.73,64.23 v38.1,64.23 v70.48,64.23 v102.87,64.23 | IC8.11 8.26,44.92 4.45,48.73 v4.45,53.18
K5  (via drill 0.6)
  Top 0.254: DISP4.P$5 v110.49,64.99 | DISP3.P$5 v78.11,64.99 | DISP2.P$5 v45.72,64.99 | DISP1.P$5 13.34,66.01 12.07,64.74 v12.07,53.18
  Bottom 0.254: DISP1.P$5 13.34,65.88 14.22,64.99 v45.72,64.99 v78.11,64.99 v110.49,64.99 | IC8.12 13.34,46.2 12.07,47.46 v12.07,53.18
K6  (via drill 0.6)
  Top 0.254: DISP4.P$8 v118.11,65.75 | DISP3.P$8 v85.73,65.75 | DISP2.P$8 v53.34,65.75 | DISP1.P$8 20.96,65.88 19.68,64.61 v19.68,53.18
  Bottom 0.254: v118.11,65.75 v85.73,65.75 v53.34,65.75 23.69,65.75 DISP1.P$8 | IC8.13 21.59,47.46 19.68,49.37 v19.68,53.18
K7  (via drill 0.6)
  Top 0.254: DISP1.P$11 28.57,63.34 29.84,62.07 29.84,49.37 29.21,48.73 v27.94,48.73
  Bottom 0.254: DISP1.P$11 28.57,67.15 29.21,66.52 60.96,66.52 | 60.96,66.52 93.22,66.52 | 93.22,66.52 125.73,66.52 DISP4.P$11 | DISP3.P$11 93.34,66.64 93.22,66.52 | DISP2.P$11 60.96,66.52 | v27.94,48.73 IC8.14
K8  (via drill 0.6)
  Top 0.254: DISP8.P$23 v102.87,55.97 | DISP7.P$23 v70.48,55.97 | DISP6.P$23 v38.1,55.97
  Bottom 0.254: DISP5.P$23 5.71,56.04 5.65,55.97 | 5.65,55.97 v38.1,55.97 v70.48,55.97 v102.87,55.97 109.73,55.97 109.98,55.72 109.98,49.24 109.47,48.73 IC7.3 | 5.65,55.97 3.75,55.97 3.18,55.4 3.18,38.64 4.45,37.37 4.45,32.16 5.02,31.59 15.24,31.59 22.61,24.22 D7.A
K9  (via drill 0.6)
  Top 0.254: DISP8.P$20 v110.49,56.74 | DISP7.P$20 v78.11,56.74 | DISP6.P$20 v45.72,56.74
  Bottom 0.254: IC7.4 109.86,47.46 110.49,48.1 v110.49,56.74 v78.11,56.74 v45.72,56.74 14.86,56.74 13.34,58.26 DISP5.P$20 13.34,62.07 13.21,62.2 2.29,62.2 1.78,61.69 1.78,27.27 5.08,23.97 7.62,23.97 D8.A
K10  (via drill 0.6)
  Top 0.254: DISP8.P$17 v118.11,57.5 | DISP7.P$17 v85.73,57.5 | DISP6.P$17 v53.34,57.5 53.34,53.18 52.07,51.91 52.07,34.13 v50.8,32.86
  Bottom 0.254: 1.27,54.45 1.27,61.94 2.03,62.7 18.35,62.7 DISP5.P$17 20.96,58.26 21.72,57.5 v53.34,57.5 v85.73,57.5 v118.11,57.5 118.11,46.83 117.48,46.2 IC7.5 | v50.8,32.86 50.8,31.59 43.17,23.96 D6.A
K11  (via drill 0.6 pad 0.25)
  Top 0.254: DISP6.P$14 60.96,51.91 59.69,50.64 v59.69,32.86
  Bottom 0.254: 60.96,58.26 93.47,58.26 | 93.47,58.26 119,58.26 | DISP8.P$14 125.73,58.26 119,58.26 | DISP7.P$14 93.34,58.39 93.47,58.26 | DISP6.P$14 60.96,58.26 | 60.96,58.26 29.21,58.26 28.57,58.89 DISP5.P$14 25.46,63.21 1.78,63.21 | 119,58.26 119,46.45 117.48,44.92 IC7.6 | D5.A 57.15,30.32 v59.69,32.86
K12  (via drill 0.6)
  Top 0.254: DISP8.P$2 v102.87,40.23 | DISP7.P$2 v70.48,40.23 v70.48,44.92 | DISP6.P$2 v38.1,40.23
  Bottom 0.254: DISP5.P$2 5.71,39.21 6.73,40.23 v38.1,40.23 v70.48,40.23 v102.87,40.23 | IC7.11 v70.48,44.92 | DISP7.P$2 70.48,34.77 73.66,31.59 D4.A
K13  (via drill 0.6)
  Top 0.254: DISP8.P$5 v110.49,39.46 | DISP7.P$5 v78.11,39.46 v78.11,46.2 | DISP6.P$5 v45.72,39.46 | v135.89,39.46 135.89,43.02 135.89,43.66 v137.79,45.56
  Bottom 0.254: DISP5.P$5 13.34,38.57 14.22,39.46 v45.72,39.46 v78.11,39.46 v110.49,39.46 v135.89,39.46 | IC7.12 v78.11,46.2 | DISP7.P$5 78.11,33.49 78.74,32.86 88.9,32.86 90.17,31.59 D3.A | v137.79,45.56 D11.A
K14  (via drill 0.6)
  Top 0.254: DISP8.P$8 v118.11,38.7 | DISP7.P$8 v85.73,38.7 v85.73,47.34 | DISP6.P$8 v53.34,38.7 | v143.51,38.7 143.51,43.02 143.51,43.66 v145.41,45.56
  Bottom 0.254: DISP5.P$8 20.96,38.19 21.46,38.7 v53.34,38.7 v85.73,38.7 v118.11,38.7 v143.51,38.7 | IC7.13 85.85,47.46 v85.73,47.34 | DISP8.P$8 118.11,34.13 116.84,32.86 107.95,32.86 106.68,31.59 D2.A | v145.41,45.56 D10.A
K15  (via drill 0.6)
  Top 0.254: v92.71,48.73 92.71,36.73 DISP7.P$11
  Bottom 0.254: DISP5.P$11 28.57,37.56 28.96,37.94 60.96,37.94 | 60.96,37.94 93.47,37.94 | 93.47,37.94 101.6,37.94 | 101.6,37.94 125.73,37.94 | 125.73,37.94 DISP8.P$11 123.2,33.56 D1.A | DISP6.P$11 60.96,37.94 | 101.61,37.94 101.6,37.94 | DISP7.P$11 93.34,37.81 93.47,37.94 | IC7.14 v92.71,48.73 | 125.73,37.94 151.13,37.94 D9.A
KEY_READ1  (via drill 0.6 pad 0.25)
  Top 0.254: SW1.1 5.13,18.94 6.35,20.16 21.59,20.16 | 21.59,20.16 38.1,20.16 | 38.1,20.16 54.61,20.16 | 54.61,20.16 71.12,20.16 | 71.12,20.16 87.63,20.16 | 87.63,20.16 104.14,20.16 | 104.14,20.16 120.65,20.16 120.7,20.11 | SW2.1 21.64,20.11 21.59,20.16 | SW3.1 38.15,20.11 38.1,20.16 | SW4.1 54.66,20.11 54.61,20.16 | SW5.1 71.17,20.11 71.12,20.16 | SW6.1 87.68,20.11 87.63,20.16 | SW7.1 104.19,20.11 104.14,20.16 | SW8.1 120.7,20.11 | 120.7,20.11 133.3,20.11 142.11,28.92 142.11,43.66 139.7,46.07 139.7,58.77 140.46,59.53 146.05,59.53 146.56,60.04 146.56,66.01 151.13,70.58 151.13,81.37 150.88,81.63 146.18,81.63 v143.89,83.91
  Bottom 0.254: IC1.37 143.92,90.16 142.75,88.99 142.75,85.06 v143.89,83.91
KEY_READ2
  Bottom 0.254: IC1.13 137.16,76.59 137.16,68.8 138.18,67.78 138.18,56.46 SW9.4 138.18,56.41 138.18,54.2 139.19,53.18 145.8,53.18 | SW11.4 153.39,54.17 152.4,53.18 145.8,53.18 | SW10.4 145.77,53.2 145.8,53.18
LED1
  Bottom 0.254: IC1.12 139.63,78 137.92,76.29 137.92,68.93 139.7,67.15 148.59,67.15 LED3.A
LED2  (via drill 0.6 pad 0.25)
  Top 0.254: LED2.A 138.43,64.61 137.41,65.63 137.41,75.53 136.27,76.67 v136.27,76.8
  Bottom 0.254: IC1.14 138.57,79.1 v136.27,76.8
LED3  (via drill 0.6 pad 0.25)
  Top 0.254: LED1.A v135.89,74.77
  Bottom 0.254: IC1.15 138,79.67 135.25,76.93 135.25,75.41 v135.89,74.77
MIDIRX
  Bottom 0.254: IC1.24 134.56,86.77 134.56,86.83 132.4,88.99 132.4,94.27 129.79,96.87 128.91,96.87 128.27,97.5 128.27,99.41 RX.1
MIDITX
  Bottom 0.254: IC1.23 134.04,86.27 131.76,88.55 131.76,94.07 129.48,96.36 128.71,96.36 127,98.08 TX.1
N$1
  Bottom 0.254: D10.C 143.11,48.07 SW10.1
N$2
  Bottom 0.254: R7.2 150.18,61.12 LED3.K
N$3
  Bottom 0.254: R8.2 142.56,61.12 LED2.K
N$4
  Bottom 0.254: IC1.9 143.37,79.1 145.99,76.48 XTL1.2 148.6,76.48 C2.2 150.18,72.62 R6.2
N$5
  Bottom 0.254: IC1.10 142.81,78.52 145.41,75.91 145.41,74.13 XTL1.1 146.24,71.16 | C11.2 146.24,71.16 | R6.1 147.56,72.48 146.24,71.16
N$6
  Bottom 0.254: R9.2 134.94,61.12 LED1.K
N$7
  Bottom 0.254: D9.C 150.73,48.07 SW11.1
N$8
  Bottom 0.254: D11.C 135.49,48.07 SW9.1
N$9
  Bottom 0.254: D7.C 24.14,17.62 25.4,16.35 26.52,16.35 SW2.3
N$11
  Bottom 0.254: D8.C 7.62,17.62 8.89,16.35 10.01,16.35 SW1.3
N$13
  Bottom 0.254: D6.C 40.64,17.62 41.91,16.35 43.03,16.35 SW3.3
N$14
  Bottom 0.254: D5.C 57.15,17.62 58.42,16.35 59.54,16.35 SW4.3
N$16
  Bottom 0.254: D4.C 73.67,17.62 74.93,16.35 76.05,16.35 SW5.3
N$17
  Bottom 0.254: R25.2 6.04,82.08 5.71,81.75 IC6.15
N$18
  Bottom 0.254: IC6.1 12.07,83.02 12.7,83.66 12.7,89.05 R24.2
N$19
  Bottom 0.254: IC6.2 12.07,81.75 13.34,83.02 13.34,87.47 13.97,88.11 19.37,88.11 R23.2
N$20
  Bottom 0.254: IC6.3 12.07,80.48 13.97,82.39 13.97,86.83 14.61,87.47 26.36,87.47 R22.2
N$21
  Bottom 0.254: R41.2 6.04,75.72 9.53,79.22 IC6.4
N$22
  Bottom 0.254: IC6.5 9.53,77.94 7.62,76.04 7.62,74.13 10.79,70.96 R40.2
N$23
  Bottom 0.254: IC6.6 9.53,76.67 8.26,75.41 8.26,74.13 9.53,72.86 19.37,72.86 R39.2
N$24
  Bottom 0.254: IC6.7 22.23,75.41 26.67,70.96 R38.2
N$30  (via drill 0.6)
  Top 0.254: v13.59,80.48 13.59,76.17 12.83,75.41 3.94,75.41 v2.67,74.13
  Bottom 0.254: IC5.14 v13.59,80.48 | v2.67,74.13 IC6.9
N$31  (via drill 0.6)
  Top 0.254: v45.34,80.48 45.34,76.04 44.7,75.41 35.18,75.41 34.54,74.77 v34.54,74.13
  Bottom 0.254: IC4.14 v45.34,80.48 | v34.54,74.13 IC5.9
N$32  (via drill 0.6)
  Top 0.254: v78.11,80.48 78.11,76.42 77.09,75.41 68.2,75.41 v66.93,74.13
  Bottom 0.254: IC3.14 v78.11,80.48 | v66.93,74.13 IC4.9
N$49
  Bottom 0.254: IC5.15 37.46,81.75 41.91,86.2 41.91,87.47 41.02,88.36 38.86,88.36 38.42,88.8 R21.2 38.1,89.69
N$50
  Bottom 0.254: IC5.1 43.81,83.02 44.45,83.66 44.45,88.74 45.72,90.01 R20.2
N$51
  Bottom 0.254: IC5.2 43.81,81.75 45.08,83.02 45.08,87.47 45.72,88.11 51.75,88.11 R19.2
N$52
  Bottom 0.254: IC5.3 43.81,80.48 45.72,82.39 45.72,86.83 46.35,87.47 58.74,87.47 R18.2
N$53
  Bottom 0.254: 38.1,71.28 R37.2 38.48,71.02 38.48,71.85 39.62,72.99 39.62,77.69 41.15,79.22 IC5.4
N$54
  Bottom 0.254: IC5.5 40.64,77.94 40.13,77.44 40.13,73.25 41.02,72.36 45.59,72.36 46.04,71.91 R36.2
N$55
  Bottom 0.254: R35.2 51.75,72.86 41.27,72.86 40.64,73.5 40.64,76.55 40.77,76.67 IC5.6
N$56
  Bottom 0.254: IC5.7 56.83,75.41 R34.2
N$60
  Bottom 0.254: D3.C 90.17,17.62 91.44,16.35 92.71,16.35 92.71,16.4 SW6.3
N$61
  Bottom 0.254: D2.C 106.69,17.62 107.95,16.35 109.07,16.35 SW7.3
N$62
  Bottom 0.254: D1.C 123.2,17.62 124.46,16.35 125.58,16.35 SW8.3
N$81
  Bottom 0.254: IC4.15 69.85,81.75 70.48,82.39 70.48,89.69 R17.2
N$82
  Bottom 0.254: IC4.1 76.2,83.02 76.84,83.66 76.84,89.38 77.47,90.01 R16.2
N$83
  Bottom 0.254: IC4.2 76.2,81.75 77.47,83.02 77.47,87.47 78.11,88.11 84.14,88.11 R15.2
N$84
  Bottom 0.254: IC4.3 76.2,80.48 78.11,82.39 78.11,86.83 78.74,87.47 91.12,87.47 R14.2
N$85
  Bottom 0.254: IC4.4 71.12,79.22 70.48,78.58 70.48,71.28 R33.2
N$86
  Bottom 0.254: IC4.5 71.76,77.94 71.12,77.31 71.12,72.86 71.76,72.23 77.16,72.23 R32.2
N$87
  Bottom 0.254: IC4.6 72.39,76.67 71.76,76.04 71.76,73.5 72.39,72.86 84.14,72.86 R31.2
N$88
  Bottom 0.254: IC4.7 89.22,75.41 R30.2
N$113
  Bottom 0.254: IC3.15 102.23,81.75 102.87,82.39 102.87,89.69 R13.2
N$114
  Bottom 0.254: IC3.1 107.21,86.41 R12.2
N$115
  Bottom 0.254: IC3.2 108.59,81.75 108.84,82.01 108.84,86.45 109.86,87.47 110.17,87.79 110.49,88.11 116.53,88.11 R11.2
N$116
  Bottom 0.254: IC3.3 108.71,80.48 109.47,81.25 109.47,85.82 110.49,86.83 110.81,87.15 111.12,87.47 123.51,87.47 R10.2
N$117
  Bottom 0.254: R29.2 102.87,71.28 102.87,71.72 104.39,73.25 104.39,77.69 105.92,79.22 IC3.4
N$118
  Bottom 0.254: R28.2 109.54,72.23 105.92,72.23 104.9,73.25 104.9,77.18 105.66,77.94 IC3.5
N$119
  Bottom 0.254: R27.2 116.53,72.86 106.05,72.86 105.54,73.37 105.54,76.42 105.79,76.67 IC3.6
N$120
  Bottom 0.254: IC3.7 121.61,75.41 R26.2
N$122
  Bottom 0.254: IC8.9 32.64,42.38 33.91,41.11 98.17,41.11 98.81,41.75 98.81,49.5 99.31,50 IC7.2
NRESET  (via drill 0.6 pad 0.25)
  Top 0.254: RESET.1 151.76,90.01 v148.72,93.06
  Bottom 0.254: R3.1 v148.72,93.06 | IC1.43 147.38,86.77 148.72,88.11 151.76,88.11 RESET.1
OFF_SW  (via drill 0.6)
  Top 0.254: v153.35,81.63 153.35,82.58 151.7,84.23 151.7,88.8 149.1,91.41 v148.02,91.41
  Bottom 0.254: IC1.3 146.8,82.53 147.7,81.63 v153.35,81.63 | OFFSW.1 143.32,100.68 144.08,99.92 144.08,97.82 144.84,97.06 144.84,93.57 147,91.41 v148.02,91.41
PTD6
  Bottom 0.254: IC1.17 | IC1.17 133.35,77.31 PD6.TP
PTD7
  Bottom 0.254: IC1.16 137.43,80.12 134.62,77.31 134.62,74.77 PD7.TP
PTH2
  Bottom 0.254: IC1.4 146.23,81.96 147.19,80.99 150.24,80.99 PH2.TP
PWR_CTRL
  Bottom 0.254: IC1.38 144.56,89.6 145.92,90.96 145.92,91.15 143.76,93.31 143.76,96.68 143.57,96.87 141.6,96.87 140.97,97.5 140.97,99.41 PWRCTL.1
SWDCLK
  Bottom 0.254: IC1.42 146.8,87.33 148.21,88.74 151.38,88.74 152.02,89.38 152.02,90.9 | 152.02,90.9 SWD_CLK.1 | R5.1 151,91.91 152.02,90.9
SWDIO  (via drill 0.6 pad 0.25)
  Top 0.254: v146.43,93.06 146.43,92.8 147.07,92.17 148.97,92.17 SWD_DAT.1
  Bottom 0.254: IC1.44 147.96,86.2 149.22,87.47 SWD_DAT.1 | R4.1 v146.43,93.06
SYNCIN
  Bottom 0.254: IC1.35 142.81,91.34 143.57,92.11 143.57,92.17 142.75,93 142.75,95.91 142.68,95.98 139.95,95.98 138.43,97.5 138.43,99.41 CLKIN.1
SYNCOUT
  Bottom 0.254: IC1.41 146.2,87.94 147.38,89.12 147.38,90.39 144.34,93.44 144.34,96.87 143.06,98.14 CKOUT.1

## Text on the board
tPlace: NOODLEBOX Main Board v3 | hotchk155
_tPlace: DISP1 | DISP3 | DISP4 | DISP2 | DISP5 | DISP6 | DISP7 | DISP8 | ENC1
_bPlace: D9 | D11 | D10 | D8 | D7 | D6 | D5 | D4 | D3 | D2 | D1
_tNames: VCC2 | SWD_CLK | RESET | SWD_DAT | GD4 | XTL1 | LED1 | LED2 | LED3 | SW9 | SW10 | SW11 | C12 | C13 | SW1 | SW2 | SW3 | SW4 | SW5 | SW6 | SW7 | SW8
_bNames: R43 | R4 | R44 | C3 | R3 | R5 | R42 | R16 | R10 | IC1 | C8 | R25 | R24 | R23 | R22 | R21 | R20 | R19 | R18 | R17 | R15 | R14 | R13 | R12 | R11 | R2 | C7 | C5 | IC2 | C6 | R1 | C4 | C1 | IC6 | IC5 | PH2 | IC4 | IC3 | PD6 | C2 | R6 | R40 | R39 | R38 | R36 | R35 | R34 | R32 | R31 | R30 | R28 | R27 | R26 | PD7 | R41 | R37 | R33 | R29 | C11 | R9 | R8 | R7 | C10 | C9 | IC8 | IC7